# Altium PCB CH32H417QEU6-R0.PcbDoc (part 2 of 2)
Units mil, origin at the board's own origin, x right, y up, seen from the top; angles counter-clockwise.
Board outline 3149.61 x 3818.9 mil, 4 copper layers (Top Layer, Layer 1, Layer 2, Bottom Layer), stack 23.756 mil thick; 96 components, 143 nets, 504 pads, 599 vias.
Unrouted connection lines stored in the file: 18.
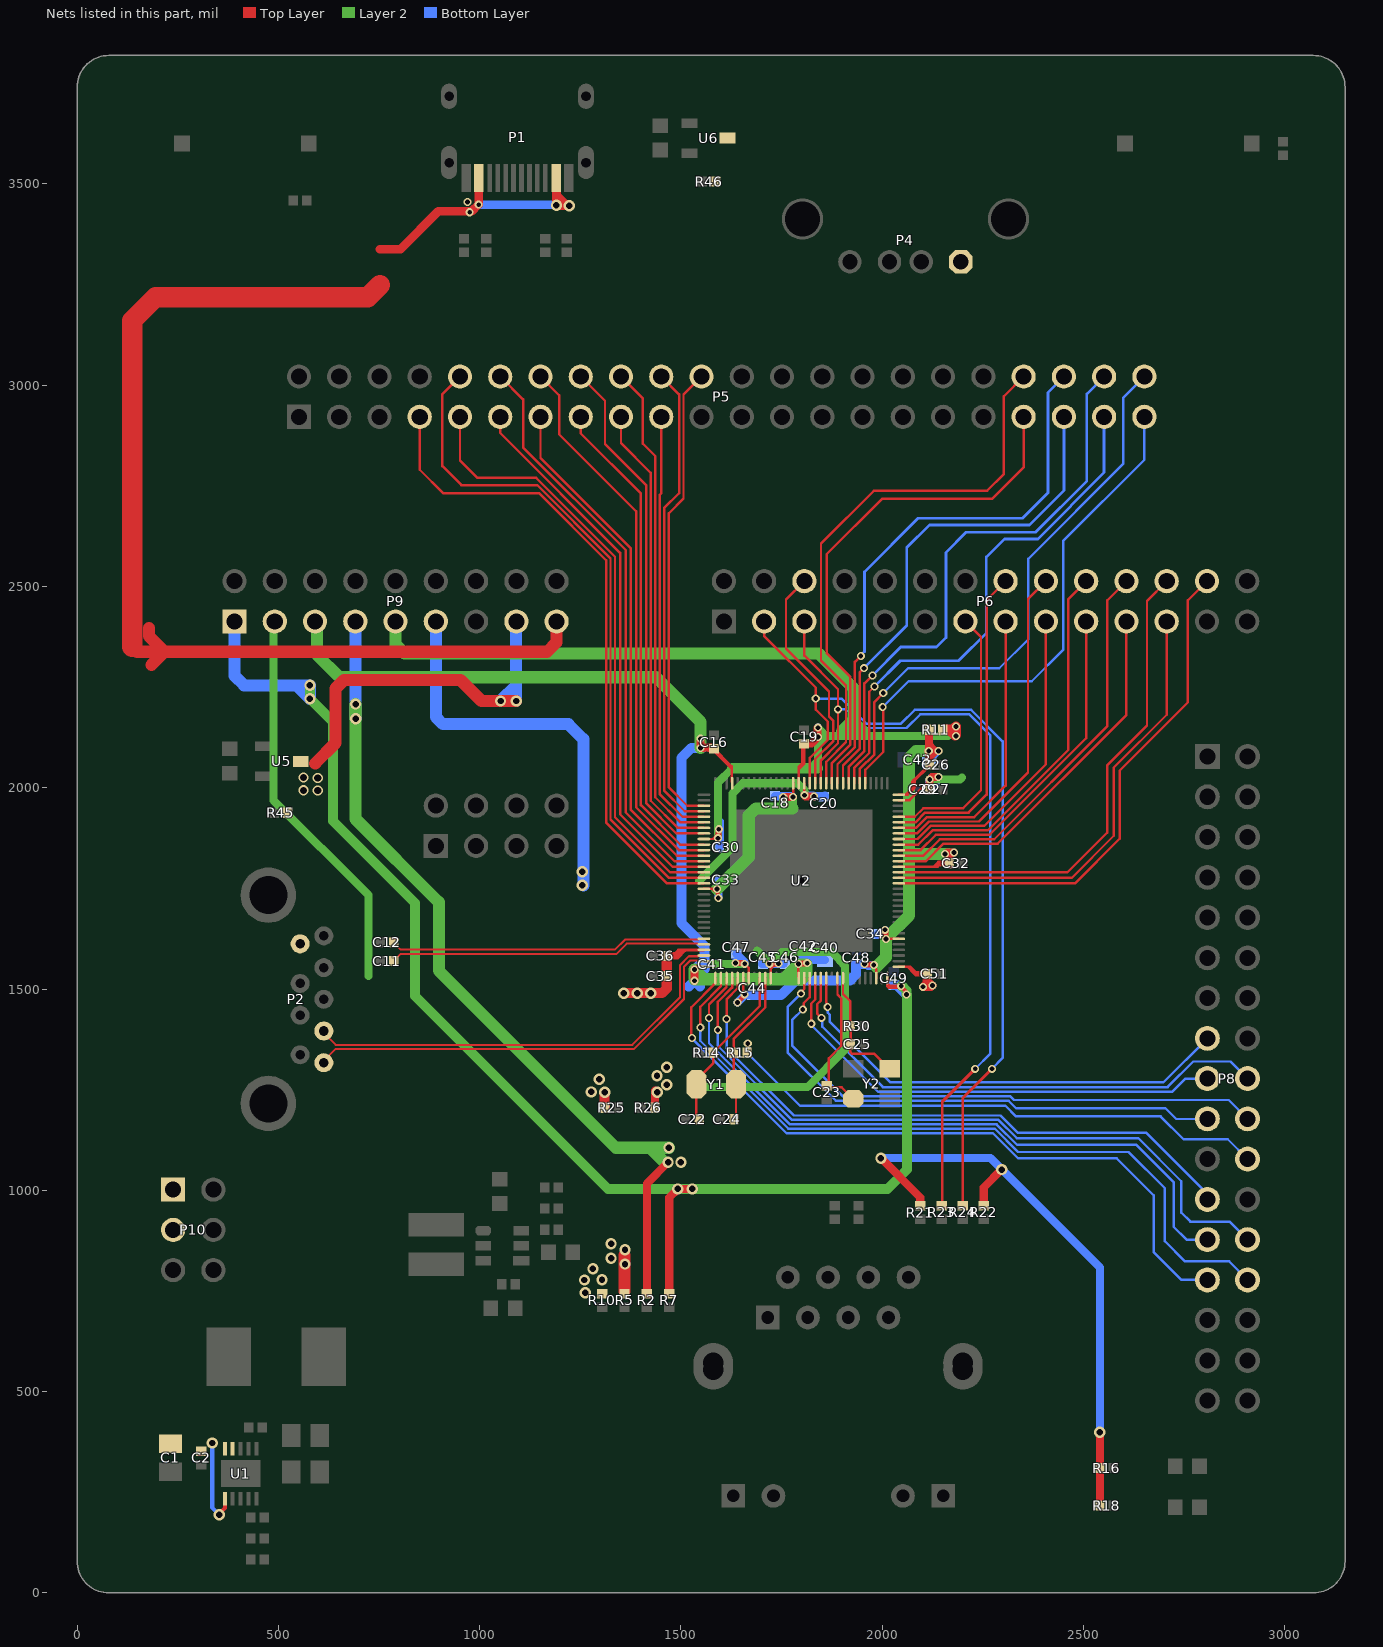
[diagram p4: the nets of this part, all layers, seen from the top]

## Via types
v1: diameter 20, hole 12, Top Layer to Bottom Layer, tented both sides, 461 vias
v2: diameter 17.72, hole 11.81, Top Layer to Bottom Layer, tented both sides, 62 vias
v3: diameter 28, hole 16, Top Layer to Bottom Layer, tented both sides, 48 vias
v4: diameter 25.59, hole 17.72, Top Layer to Bottom Layer, tented both sides, 14 vias
v5: diameter 19.68, hole 11.81, Top Layer to Bottom Layer, tented both sides, 14 vias

## Nets (pads, with @x,y where several pads share a name; then routed paths per layer and width w, separated by ;. In a path a pad name is that pad's centre, name@x,y a point inside that pad or via, vN(x,y) a via of type N, cw(c..) or ccw(c..) an arc to the next point about the centre after c; other vN are vias at no path point) (continued)
PC15: P8.22 R15.1 | length 1399.4
  Top Layer w6: R15.1@1664.2,1341.9 1665.76,1343.46 v1(1665.76,1364.88)
  Bottom Layer w6: v1(1665.76,1364.88) 1665.31,1364.42 1665.31,1340.43 1795.56,1210.19 2305.66,1210.19 2332.33,1183.53 2691.37,1183.53 2748.19,1126.7 2858.23,1126.7 P8.22@2907.49,1077.44
PD0: P5.22 U2.99 | length 1160
  Top Layer w6: P5.22@1551,3021.33 1506.19,2976.52 1506.19,2718.14 1469.96,2681.91 1469.96,2000.74 1515.4,1955.3 U2.99@1557.01,1955.3
PD1: P5.20 U2.100 | length 1182.4
  Top Layer w6: P5.20@1451,3021.33 1495.19,2977.15 1495.19,2731.6 1458.02,2694.44 1458.02,1992.88 1509.38,1941.52 U2.100@1557.01,1941.52
PD2: P5.19 U2.101 | length 1071.8
  Top Layer w6: P5.19@1451,2921.33 1451,2730.9 1447.02,2726.93 1447.02,1984.72 1504,1927.74 U2.101@1557.01,1927.74
PD3: P5.18 U2.102 | length 1227
  Top Layer w6: P5.18@1351,3021.33 1405.5,2966.84 1405.5,2854.26 1436.02,2823.73 1436.02,1976.4 1498.46,1913.96 U2.102@1557.01,1913.96
PD4: P5.17 U2.103 | length 1144.3
  Top Layer w6: P5.17@1351,2921.33 1351,2856.03 1425.02,2782 1425.02,1967.6 1492.44,1900.18 U2.103@1557.01,1900.18
PD5: P5.16 U2.104 | length 1301.9
  Top Layer w6: P5.16@1251,3021.33 1311.18,2961.15 1311.18,2853.7 1414.02,2750.85 1414.02,1960.7 1488.32,1886.4 U2.104@1557.01,1886.4
PD6: P5.15 U2.106 | length 1223.6
  Top Layer w6: P5.15@1251,2921.33 1251,2879.85 1400.34,2730.51 1400.34,1956.78 1498.28,1858.84 U2.106@1557.01,1858.84
PD7: P5.14 U2.107 | length 1380.8
  Top Layer w6: P5.14@1151,3021.33 1197.73,2974.6 1197.73,2877.61 1388.94,2686.4 1388.94,1951.06 1494.94,1845.07 U2.107@1557.01,1845.07
PD8: P5.43 U2.69 | length 1377.8
  Top Layer w6: U2.69@1957.6,2011.4 1957.6,2044.37 2002.69,2089.46 2002.69,2198.81 v1(2001.07,2200.43)
  Bottom Layer w6: v1(2001.07,2200.43) 2065.16,2264.52 2371.2,2264.52 2449.11,2342.43 2449.11,2612.86 2651,2814.75 P5.43@2651,2921.33
PD9: P5.44 U2.70 | length 1435.5
  Top Layer w6: U2.70@1943.82,2011.4 1943.82,2046.15 1980.42,2082.75 1980.42,2212.87 v1(2002.45,2234.9)
  Bottom Layer w6: v1(2002.45,2234.9) 2064.21,2296.66 2290.61,2296.66 2362.76,2368.81 2362.76,2568.81 2598.89,2804.94 2598.89,2969.22 P5.44@2651,3021.33
PD10: P5.41 U2.71 | length 1300.7
  Top Layer w6: U2.71@1930.04,2011.4 1930.04,2048.63 1967.62,2086.21 1967.62,2238.4 v1(1980.94,2251.72)
  Bottom Layer w7: v1(1980.94,2251.72) 2044.51,2315.29 2189.32,2315.29 2258.43,2384.4 2258.43,2573.33 2303.29,2618.18 2386.52,2618.18 2551,2782.66 P5.41@2551,2921.33
PD11: P5.42 U2.72 | length 1425.9
  Top Layer w6: U2.72@1916.26,2011.4 1916.26,2051.82 1955.62,2091.18 1955.62,2259.21 v1(1975.43,2279.02)
  Bottom Layer w7: v1(1975.43,2279.02) 2045.96,2349.55 2134.83,2349.55 2157.97,2372.7 2157.97,2584.41 2208.07,2634.51 2380.56,2634.51 2508.07,2762.01 2508.07,2978.4 P5.42@2551,3021.33
PD12: P5.39 U2.73 | length 1282.8
  Top Layer w6: U2.73@1902.48,2011.4 1902.48,2055.01 1943.62,2096.15 1943.62,2286.09 v1(1954.47,2296.94)
  Bottom Layer w7: v1(1954.47,2296.94) 2060.61,2403.09 2060.61,2596.42 2116.92,2652.72 2365.6,2652.72 2451,2738.12 P5.39@2451,2921.33
PD13: P5.40 U2.74 | length 1394.4
  Top Layer w6: U2.74@1888.7,2011.4 1888.7,2058.2 1931.93,2101.43 1931.93,2312.61 v1(1946.64,2327.33)
  Bottom Layer w7: v1(1946.64,2327.33) 1946.64,2328.37 1956.21,2337.93 1956.21,2536.25 2089.15,2669.19 2347.86,2669.19 2411.5,2732.83 2411.5,2981.83 P5.40@2451,3021.33
PD14: P5.37 U2.75 | length 1316.1
  Top Layer w6: U2.75@1874.92,2011.4 1874.92,2061.4 1920.93,2107.4 1920.93,2275.38 1861.88,2334.43 1861.88,2579.95 1999.26,2717.34 2272.51,2717.34 2351,2795.83 P5.37@2351,2921.33
PD15: P5.38 U2.76 | length 1429.2
  Top Layer w6: U2.76@1861.14,2011.4 1861.14,2064.59 1909.93,2113.37 1909.93,2253.5 1847.69,2315.74 1847.69,2606.51 1979.02,2737.83 2260.4,2737.83 2302.22,2779.66 2302.22,2972.55 P5.38@2351,3021.33
PE0: P5.9 U2.111 | length 1517.4
  Top Layer w6: P5.9@951,2921.33 951,2812.8 994.13,2769.67 1140.31,2769.67 1336.11,2573.88 1336.11,1926.64 1472.8,1789.95 U2.111@1557.01,1789.95
PE1: P5.10 U2.112 | length 1693.6
  Top Layer w6: P5.10@951,3021.33 907.34,2977.67 907.34,2798.89 954.6,2751.62 1142.81,2751.62 1324.94,2569.49 1324.94,1921.22 1469.99,1776.17 U2.112@1557.01,1776.17
PE2: P8.27 U2.1 | length 1786.8
  Top Layer w6: v1(1527.04,1378.33) 1525.73,1379.64 1525.73,1454.73 1585.55,1514.55 U2.1@1585.55,1527.15
  Bottom Layer w6: v1(1527.04,1378.33) 1527.04,1376.82 1762.06,1141.8 2275.01,1141.8 2337.19,1079.63 2582.01,1079.63 2673.87,987.77 2673.87,847 2743.42,777.44 P8.27@2807.49,777.44
PE3: P8.28 U2.2 | length 1859.7
  Top Layer w6: v1(1547.95,1404.66) 1547.95,1455.73 1599.33,1507.11 U2.2@1599.33,1527.15
  Bottom Layer w6: v1(1547.95,1404.66) 1547.95,1371.47 1766.62,1152.8 2279.57,1152.8 2337.17,1095.2 2611.74,1095.2 2701.82,1005.12 2701.82,873.38 2751.95,823.25 2861.68,823.25 P8.28@2907.49,777.44
PE4: P8.25 U2.3 | length 1684.9
  Top Layer w6: v1(1569.53,1428.13) 1569.53,1461.76 1613.11,1505.33 U2.3@1613.11,1527.15
  Bottom Layer w6: v1(1569.53,1428.13) 1569.53,1365.44 1771.17,1163.8 2284.12,1163.8 2335.26,1112.66 2631.4,1112.66 2723.51,1020.55 2723.51,909.53 2755.6,877.44 P8.25@2807.49,877.44
PE5: P8.26 U2.4 | length 1744
  Top Layer w6: v1(1591.39,1398.45) 1591.39,1468.06 1626.89,1503.56 U2.4@1626.89,1527.15
  Bottom Layer w6: v1(1591.39,1398.45) 1591.39,1359.14 1775.73,1174.8 2288.68,1174.8 2334.29,1129.2 2636.18,1129.2 2742.79,1022.58 2742.79,944.72 2765.45,922.07 2862.87,922.07 P8.26@2907.49,877.44
PE6: P8.23 U2.5 | length 1543.1
  Top Layer w6: v1(1613.25,1425.44) 1613.25,1474.36 1640.67,1501.78 U2.5@1640.67,1527.15
  Bottom Layer w6: v1(1613.25,1425.44) 1613.25,1352.84 1780.28,1185.8 2293.24,1185.8 2335.84,1143.2 2654.94,1143.2 2807.49,990.65 P8.23@2807.49,977.44
PE7: P6.21 U2.52 | length 947.8
  Top Layer w6: U2.52@2041.26,1817.51 2108.31,1817.51 2151.95,1861.14 2286.67,1861.14 2606.49,2180.97 P6.21@2606.49,2413
PE8: P6.22 U2.53 | length 1030.6
  Top Layer w6: U2.53@2041.26,1831.29 2102.33,1831.29 2143.19,1872.14 2278.04,1872.14 2559.16,2153.27 2559.16,2465.68 P6.22@2606.49,2513
PE9: P6.19 U2.54 | length 870.3
  Top Layer w6: U2.54@2041.26,1845.07 2095.19,1845.07 2133.27,1883.14 2266.52,1883.14 2506.49,2123.11 P6.19@2506.49,2413
PE10: P6.20 U2.55 | length 955.5
  Top Layer w6: U2.55@2041.26,1858.84 2089.44,1858.84 2124.74,1894.14 2261.97,1894.14 2462.3,2094.48 2462.3,2468.81 P6.20@2506.49,2513
PE11: P6.17 U2.56 | length 796.8
  Top Layer w6: U2.56@2041.26,1872.62 2087.66,1872.62 2120.18,1905.14 2253.23,1905.14 2406.49,2058.41 P6.17@2406.49,2413
PE12: P6.18 U2.57 | length 876.9
  Top Layer w6: U2.57@2041.26,1886.4 2085.89,1886.4 2115.63,1916.14 2239.99,1916.14 2361.89,2038.04 2361.89,2468.41 P6.18@2406.49,2513
PE13: P6.15 U2.58 | length 716.5
  Top Layer w6: U2.58@2041.26,1900.18 2084.11,1900.18 2111.07,1927.14 2228.34,1927.14 2306.49,2005.29 P6.15@2306.49,2413
PE14: P6.16 U2.59 | length 796.3
  Top Layer w6: U2.59@2041.26,1913.96 2082.33,1913.96 2106.52,1938.14 2214.58,1938.14 2259.19,1982.76 2259.19,2465.71 P6.16@2306.49,2513
PE15: P6.13 U2.60 | length 666.5
  Top Layer w6: U2.60@2041.26,1927.74 2080.56,1927.74 2101.96,1949.14 2200.63,1949.14 2245.15,1993.67 2245.15,2374.34 P6.13@2206.49,2413
PF0: P6.5 R23.1 U2.77 | length 2104.5
  Top Layer w6: P6.5@1806.49,2413 1806.49,2328.17 1889.93,2244.73 v1(1889.93,2194.79) 1889.93,2110.34 1847.36,2067.78 U2.77@1847.36,2011.4
  Top Layer w7: R23.1@2148.87,962 2148.87,1219.86 v1(2230.79,1301.78)
  Bottom Layer w6: v1(1889.93,2194.79) 1909.25,2194.79 1955.75,2148.28 2060.48,2148.28 2094.4,2182.21 2216.41,2182.21 2267.93,2130.69 2267.93,1338.92 v1(2230.79,1301.78)
PF1: P6.6 U2.78 | length 587.9
  Top Layer w6: P6.6@1806.49,2513 1760.85,2467.36 1760.85,2345.85 1867.62,2239.08 1867.62,2219.9 1867.62,2176.63 1878.53,2165.71 1878.53,2115.92 1833.58,2070.97 U2.78@1833.58,2011.4
PF2: P6.3 R24.1 U2.79 | length 2216.1
  Top Layer w6: P6.3@1706.49,2413 1706.49,2377.06 1834.79,2248.76 v1(1834.79,2221.31) 1834.79,2193.85 1864.6,2164.05 1864.6,2118.96 1819.8,2074.16 U2.79@1819.8,2011.4
  Top Layer w7: R24.1@2200,962 2200,1229.58 v1(2272.2,1301.78)
  Bottom Layer w6: v1(1834.79,2221.31) 1898.28,2221.31 1960.3,2159.28 2046.58,2159.28 2080.51,2193.21 2220.97,2193.21 2298.96,2115.23 2298.96,1328.54 v1(2272.2,1301.78)
PF3: P5.13 U2.108 | length 1297.8
  Top Layer w6: P5.13@1151,2921.33 1151,2819.11 1375.65,2594.46 1375.65,1945.04 1489.4,1831.29 U2.108@1557.01,1831.29
PF4: P5.12 U2.109 | length 1456.2
  Top Layer w6: P5.12@1051,3021.33 1107.88,2964.45 1107.88,2845.12 1362.79,2590.21 1362.79,1938.73 1484.01,1817.51 U2.109@1557.01,1817.51
PF5: P5.11 U2.110 | length 1372.8
  Top Layer w6: P5.11@1051,2921.33 1051,2881.08 1348.8,2583.27 1348.8,1934.02 1479.1,1803.73 U2.110@1557.01,1803.73
PF6: P8.19 U2.17 | length 1313
  Top Layer w6: v1(1798.24,1488.43) 1798.24,1492.21 1806.02,1500 U2.17@1806.02,1527.15
  Bottom Layer w6: v1(1798.24,1488.43) 1764.99,1455.18 1764.99,1342.15 1884.72,1222.42 2313.67,1222.42 2332.45,1203.64 2703.54,1203.64 2730.13,1177.05 2807.1,1177.05 P8.19@2807.49,1177.44
PF7: P8.20 U2.18 | length 1392.5
  Top Layer w6: v1(1802.59,1449.48) 1804.43,1451.32 1804.43,1464.63 1819.8,1480 U2.18@1819.8,1527.15
  Bottom Layer w6: v1(1802.59,1449.48) 1775.99,1422.88 1775.99,1359.88 1902.45,1233.42 2318.23,1233.42 2327.36,1224.29 2860.64,1224.29 P8.20@2907.49,1177.44
PF8: P8.17 U2.19 | length 1187
  Top Layer w6: v1(1823.64,1413.68) 1823.64,1440.63 1823.64,1463.99 1833.58,1473.94 U2.19@1833.58,1527.15
  Bottom Layer w6: v1(1823.64,1413.68) 1823.64,1410.75 1989.96,1244.42 2719.99,1244.42 2753.01,1277.44 P8.17@2807.49,1277.44
PF9: P8.18 U2.20 | length 1292.4
  Top Layer w6: U2.20@1847.36,1527.15 1847.36,1471.43 1837.97,1462.03 1837.97,1439.5 v1(1849.04,1428.43)
  Bottom Layer w6: v1(1849.04,1428.43) 1851.37,1426.1 1851.37,1406.43 2001.6,1256.21 2708.85,1256.21 2772.49,1319.84 2865.09,1319.84 P8.18@2907.49,1277.44
PF10: P8.15 U2.21 | length 1157.5
  Top Layer w6: U2.21@1861.14,1527.15 1861.14,1465.67 1861.7,1465.11 1861.7,1457.83 v1(1864.38,1455.16)
  Bottom Layer w6: v1(1864.38,1455.16) 1864.8,1454.74 1864.8,1440.96 1869.04,1436.72 1869.04,1419.51 2020.6,1267.94 2697.99,1267.94 P8.15@2807.49,1377.44
PF11: P6.26 U2.48 | length 1323.9
  Top Layer w6: U2.48@2041.26,1762.39 2478.76,1762.39 2589.83,1873.46 2589.83,2042.53 2758.89,2211.59 2758.89,2465.41 P6.26@2806.49,2513
PF12: P6.23 U2.49 | length 1163.9
  Top Layer w6: U2.49@2041.26,1776.17 2470.65,1776.17 2575.03,1880.55 2575.03,2049.81 2706.49,2181.26 P6.23@2706.49,2413
PF13: P6.24 U2.50 | length 1243.9
  Top Layer w6: U2.50@2041.26,1789.95 2460.05,1789.95 2558.3,1888.2 2558.3,2055.32 2657.55,2154.57 2657.55,2464.07 P6.24@2706.49,2513
PF14: P5.7 U2.113 | length 1644.4
  Top Layer w6: P5.7@851,2921.33 851,2789.82 908.93,2731.89 1146.98,2731.89 1313.88,2564.99 1313.88,1913.98 1465.48,1762.39 1480.67,1762.39 ; 1480.67,1762.39 U2.113@1557.01,1762.39
USBSS_RXN: P2.6 U2.126 | length 1100.2
  Top Layer w5.1: P2.6@612.91,1395.7 612.91,1390.47 642,1361.38 1253.1,1361.38 1287.72,1361.38 1379.4,1361.38 1497.49,1479.48 1497.49,1559.51 1519.4,1581.41 1542.25,1581.41 1544.09,1583.25 U2.126@1557.01,1583.25
USBSS_RXP: P2.5 U2.127 | length 1100.2
  Top Layer w5.1: P2.5@612.91,1316.96 612.91,1322.19 642,1351.28 1257.28,1351.28 1283.54,1351.28 1383.58,1351.28 1507.59,1475.29 1507.59,1555.32 1523.59,1571.31 1542.25,1571.31 1544.09,1569.47 U2.127@1557.01,1569.47
USBSS_TXN: C12.2 U2.123 | length 789.7
  Top Layer w5.1: C12.2@786.46,1615.55 786.46,1614.57 803.43,1597.6 1335.89,1597.6 1361.04,1622.75 1542.25,1622.75 1544.09,1624.59 U2.123@1557.01,1624.59
USBSS_TXP: C11.2 U2.124 | length 789.7
  Top Layer w5.1: C11.2@786.46,1569.55 786.46,1570.54 803.43,1587.5 1340.07,1587.5 1365.22,1612.65 1542.25,1612.65 1544.09,1610.81 U2.124@1557.01,1610.81
VBAT: C47.2 P9.11 U2.7 | length 1209.6
  Top Layer w6: v1(1658.21,1562.55) 1668.23,1552.49 U2.7@1668.23,1527.15
  Top Layer w15: v1(1635.32,1564.65) 1652.84,1564.65 1653.99,1563.51 1657.25,1563.51 v1(1658.21,1562.55)
  Layer 2 w20: 1583.56,1562.55 v1(1658.21,1562.55)
  Bottom Layer w20: v1(1635.32,1564.65) 1637.43,1562.55 v1(1658.21,1562.55) ; C47.2@1637.5,1587.44 1638.49,1587.44 1658.21,1567.72 v1(1658.21,1562.55) ; v1@1637.7,1571.06 1639.52,1569.25 1651.51,1569.25 v1(1658.21,1562.55)
  Bottom Layer w30: P9.11@891,2413 891,2175.55 908.57,2157.98 1220.08,2157.98 1257.51,2120.54 1257.51,1791.41 v3@1257.51,1757.45
  other v3: 1254.94,1757.45 1254.94,1791.41
VBUS_CC: C1.2 C2.2 P1.A4 P1.B4 P9.17 P10.1 P10.3 U1.1 U1.9 U1.10 | length 3621.6
  Top Layer w10: v3(353.36,194.4) 353.36,197.2 366.77,210.61 U1.1@366.77,234.35
  Top Layer w22: 752.17,3337.71 803.19,3337.71 897.38,3431.91 980.32,3431.91 v1@997.03,3448.63 ; v1@997.52,3449.11 P1.B4@997.52,3514.64 ; P1.A4@1190.43,3514.64 1190.43,3471.86 ; v3(1222.6,3445.8) v3@1216.49,3445.8 ; 1190.43,3471.86 1190.43,3446.71 v3(1190.53,3446.62) 1191.34,3445.8 v3@1216.49,3445.8 ; 1190.43,3471.86 v3@1216.49,3445.8
  Top Layer w30: 137.05,2349.18 148.42,2337.81 217.38,2337.81 ; 178.75,2396.29 178.75,2376.44 217.38,2337.81 ; 184.82,2305.25 217.38,2337.81 ; P9.17@1191,2413 1191,2361.2 1167.61,2337.81 217.38,2337.81
  Top Layer w50: 137.05,2349.18 137.05,3160.59 194.68,3218.22 721.99,3218.22 752.17,3248.4
  Bottom Layer w10: v3(335.63,372.32) 335.63,212.13 v3(353.36,194.4)
  Bottom Layer w22: v1(997.52,3448.14) 1189,3448.14 v3(1190.53,3446.62)
  other v1: 975.2,3429.39 969.47,3454.8
VBUS_FS: P4.1 R46.2 U6.3
VBUS_USB: P2.1 P9.15 R45.2 U5.3 | length 987.9
  Top Layer w30: 591.45,2060.6 641.96,2111.12 641.96,2246.63 662.81,2267.48 952.29,2267.48 1004.39,2215.38 v3(1051.86,2215.38) v3(1090.57,2215.38)
  Bottom Layer w30: 1090.57,2265 1090.57,2254.09 ; P9.15@1090.57,2412.57 1090.57,2254.09 ; 1090.57,2254.09 v3(1051.86,2215.38) v3(1090.57,2215.38) 1090.57,2254.09
  Bottom Layer w50: P9.15@1090.57,2412.57 P9.15@1091,2413
  other v4: 597.6,1993.15 562.13,1993.54 597.6,2024.07 562.13,2025.28
VDD33: C16.1 C40.2 C41.2 C42.2 P9.5 R5.1 U2.16 U2.93 U2.128 | length 2988.4
  Top Layer w6: v1@1528.24,1552.97 1530.96,1555.69 U2.128@1544.33,1555.69 ; v1@1532.66,1549.49 1538.12,1549.49 U2.128@1544.33,1555.69 ; v1(1533.48,1548.39) v1@1533.48,1548.69 ; U2.128@1557.01,1555.69 U2.128@1544.33,1555.69 ; 1567.1,2092.32 1580.72,2092.32 1625.89,2047.15 ; C16.1@1578.82,2099.55 1579.81,2099.55 1625.89,2053.47 1625.89,2047.15 ; U2.93@1625.89,2014.4 1625.89,2047.15 ; U2.16@1791.24,1530.15 1791.3,1530.21 1791.3,1561.63 v1(1791.55,1561.88)
  Top Layer w15: v1(1791.55,1561.88) 1792.51,1562.84 1811,1562.84 1812.44,1564.28 v1@1812.44,1564.84
  Top Layer w20: v1(1533.48,1520.53) v1(1533.48,1548.39) ; v1@1548.99,2115.31 1548.99,2106.26 1556.18,2099.06 1556.68,2099.55 C16.1@1578.82,2099.55
  Top Layer w30: R5.1@1359.75,748.34 v3@1359.75,839.71
  Layer 2 w30: P9.5@595.41,2421.66 595.41,2330.53 651.56,2274.38 1437.86,2274.38 1548.59,2163.65 v1(1548.59,2121.81) v1(1548.59,2099.06) ; 1556.01,1524.28 1533.48,1524.28 v1(1533.48,1548.39) 1556.01,1525.87 1556.01,1524.28 ; 1556.01,1524.28 1753.95,1524.28 ; 1753.95,1524.28 1790.12,1560.45 1811.87,1560.45 1811.87,1549.73 ; 1753.95,1524.28 1786.43,1524.28 ; 1786.43,1524.28 1811.87,1549.73 ; 1786.43,1524.28 1799.32,1524.28 1811.87,1536.83 1811.87,1549.73
  Bottom Layer w20: v1(1791.55,1561.88) 1804.22,1574.55 ; v1@1794.33,1560.82 v1@1811.84,1560.82 ; v1(1813.61,1564.09) v1@1808.17,1569.53 ; C42.2@1813.61,1588.1 C42.2@1815.08,1589.57 ; C40.2@1857.68,1572.57 C40.2@1856.7,1572.57 ; 1804.22,1574.55 C42.2@1804.22,1589.57 C42.2@1815.08,1589.57 ; 1804.22,1574.55 1804.22,1573.48 v1@1808.17,1569.53 ; v1@1808.17,1569.53 1811.21,1572.57 C40.2@1856.7,1572.57 ; C42.2@1815.08,1589.57 1839.7,1589.57 C40.2@1856.7,1572.57
  Bottom Layer w25: 1519.26,1506.31 v1(1533.48,1520.53) ; 1547.41,1506.6 v1(1533.48,1520.53) ; C41.2@1551.05,1565.58 v1@1533.86,1548.39 ; v1@1552.18,2099.06 v1(1548.59,2099.06) 1526.3,2099.06 1500.89,2073.65 1500.89,1663.94 1557.94,1606.89 C41.2@1557.94,1558.69 ; 1557.94,1548.39 v1@1533.86,1548.39 ; v1(1533.48,1520.53) v1(1533.48,1548.39) v1@1533.86,1548.39
  other v3: 1360.93,816.86 1326.34,831.07 1360.94,852.07 1326.34,867.04
VDD33A: C51.2 P9.3 R10.1 U2.33 | length 1195.5
  Top Layer w6: U2.33@2041.26,1555.69 2062.08,1555.69 ; C51.2@2102.42,1541.82 2082.98,1541.82 2069.11,1555.69 2062.08,1555.69 ; C51.2@2106.89,1537.35 2080.43,1537.35 ; C51.2@2111.39,1533.75 2084.03,1533.75 2080.43,1537.35 ; 2062.08,1555.69 2080.43,1537.35
  Top Layer w20: 2110.39,1521.83 2111.39,1520.83 ; C51.2@2111.39,1531.6 2111.39,1520.83 ; v1@2123.56,1508.66 2111.39,1520.83 ; v1(2124.56,1508.66) 2121.42,1505.52 v1(2101.43,1505.52) 2111.39,1515.49 2111.39,1520.83
  Layer 2 w20: P9.3@488.2,2405.56 488.2,1968.64 723.57,1733.27 723.57,1532.53
  other v3: 1262.1,745.44 1260.15,777.14 1303.75,777.59 1281.28,805.39
VDD_1.2A: C35.2 C36.2 R25.1 U2.125 | length 482.3
  Top Layer w6: C36.2@1464.65,1582.07 1479.41,1582.07 1482.52,1585.18 ; C36.2@1466.29,1586.22 1467.32,1585.18 1482.52,1585.18 ; C36.2@1469.14,1589.28 1469.54,1588.87 1485.15,1588.87 ; C36.2@1473.88,1576.72 1480.37,1576.72 ; C36.2@1474.94,1576.41 1485.59,1576.41 1485.91,1576.72 ; 1484.34,1588.07 1485.15,1588.87 ; 1493.37,1597.03 1485.21,1588.87 ; 1500.69,1597.03 1480.37,1576.72 ; 1506.22,1597.03 1485.91,1576.72 ; 1506.22,1597.53 1493.81,1597.53 1485.15,1588.87 ; 1510.74,1595.1 1492.36,1576.72 1485.91,1576.72 ; 1480.37,1576.72 1485.91,1576.72 ; 1482.52,1585.18 1486.21,1588.87 1485.21,1588.87 ; 1485.15,1588.87 1485.21,1588.87
  Top Layer w7: 1506.22,1597.03 U2.125@1557.01,1597.03
  Top Layer w20: v3@1398.65,1489.15 v3@1399.15,1489.65 ; v3(1425.11,1489.39) v3@1425.37,1489.65
  Top Layer w25: v3@1310.47,1237.11 1310.47,1205.35 1310.76,1205.06 R25.1@1310.86,1205.06 ; v3@1360.98,1489.31 1361.32,1489.65 1399.15,1489.65 1425.37,1489.65 1453.11,1489.65 1464.65,1501.19 C35.2@1464.65,1532.07 C36.2@1464.65,1582.07
  other v3: 1277.16,1244.33 1310.47,1243.78 1296.92,1275.57 1358.05,1489.39 1391.58,1489.39
VDDIO: C18.1 C26.1 C32.1 C33.2 C34.2 C43.2 C44.2 C48.1 P9.7 R2.1 R11.2 R16.1 R18.1 R21.1 R22.1 U2.6 U2.30 U2.38 U2.51 U2.64 U2.82 U2.114 | length 6447.9
  Top Layer w6: v1(1589.25,1748.53) 1589.21,1748.57 1578.05,1748.57 ; v1@1589.7,1726.05 1590.05,1726.4 1590.05,1736.57 1578.05,1748.57 ; v1@1590.83,1742.36 1591.64,1742.36 1592.73,1741.27 v1(1592.73,1725.79) ; U2.6@1654.45,1527.15 1654.45,1494.54 v1@1657.5,1491.5 ; v1@1778.43,1981.98 U2.82@1778.43,2011.37 ; v1(1978.94,1559.45) 1978.94,1555.66 1985.16,1549.44 U2.30@1985.16,1527.15 ; v1(2008.83,1624.59) U2.38@2041.26,1624.59 ; U2.51@2041.26,1803.73 2126.95,1803.73 ; U2.64@2041.26,1982.86 2058.38,1982.86 ; 2077.14,2018.28 C26.1@2114.19,2055.33 ; 2079.2,2020.33 2077.14,2018.27 ; C26.1@2114.94,2051.4 2080.7,2017.15 2080.7,2000.7 2077.14,1997.14 ; C26.1@2116.2,2054.49 C26.1@2116.2,2055.47 ; C32.1@2159.61,1807.55 2159.25,1807.91 2142.01,1807.91 2137.82,1803.73 2131.27,1803.73 ; C32.1@2161.97,1816.26 2139.48,1816.26 2126.95,1803.73 ; C32.1@2166.18,1812.36 2139.9,1812.36 2131.27,1803.73 ; 1578.05,1748.57 1578.01,1748.61 U2.114@1557.01,1748.61 U2.114@1557.01,1748.61 1578.05,1748.57 ; 2058.38,1982.86 2073.78,1998.25 2073.78,2014.91 2077.14,2018.27 ; 2058.38,1982.86 2062.86,1982.86 2077.14,1997.14 ; 2077.14,1997.14 2077.14,2018.27 ; 2126.95,1803.73 2131.27,1803.73
  Top Layer w12: v1(1640.67,1466.8) 1658.3,1484.42 v1(1658.3,1486.91)
  Top Layer w15: v1@1962.44,1560.41 1977.98,1560.41 v1(1978.94,1559.45) ; v1(2007.01,1647.12) 2007.92,1646.21 2007.92,1626.9 2009.05,1625.77 v1@2010.66,1625.77
  Top Layer w20: R2.1@1415.47,741.95 1415.47,1017.15 v3(1467.92,1069.59) ; v1(1754.01,1976.77) v1(1778.4,1976.77) ; v3(1996.55,1079.94) 2094.28,982.2 R21.1@2094.28,961.44 ; v1@2115.27,2091.93 v1@2116.2,2091 ; 2115.8,2075.44 2115.8,2090.61 v1(2115.41,2091) v1@2116.2,2091 ; C26.1@2116.2,2055.47 C26.1@2116.2,2056.47 2116.2,2075.44 ; R11.2@2116.2,2144.25 R11.2@2116.2,2144.16 ; R11.2@2116.87,2144.83 R11.2@2116.2,2144.16 ; 2126.44,2095.45 2116.2,2105.69 ; 2129.35,2088.59 2116.2,2075.44 ; v1@2139.24,2091 v1@2116.2,2091 ; v1@2157.8,1835.68 2161.56,1839.44 v1(2178.03,1839.44) ; v1@2165.69,1835 2165.93,1834.75 2165.93,1812.6 C32.1@2166.18,1812.36 2166.18,1830.63 v1@2174.31,1838.76 ; R22.1@2252,962 2252,1007.06 v3(2296.5,1051.56) ; R18.1@2540.39,217.03 R16.1@2540.39,310.01 v3(2540.39,399.08) ; 2116.2,2075.44 v1@2116.2,2091 ; v1@2116.2,2091 2116.2,2105.69 ; 2116.2,2105.69 R11.2@2116.2,2144.16
  Layer 2 w20: 1751.62,1948.37 1754.01,1950.76 ; 1776.3,1948.37 1778.4,1950.47 v1(1778.4,1976.77) 1766.2,1976.77 ; 1754.01,1950.76 v1(1754.01,1976.77) 1766.2,1976.77 ; 1754.01,1950.76 1766.2,1962.96 1766.2,1976.77
  Layer 2 w30: v3@691.63,2207.92 v3(691.63,2207.76) 691.63,1922.36 898.53,1715.45 898.53,1545.49 1338.24,1105.78 1422.76,1105.78 ; 1454.36,1074.18 1422.76,1105.78 ; v3(1469.96,1105.78) 1422.76,1105.78 ; v1(1589.25,1748.53) 1668.26,1827.54 1668.26,1930.8 1685.84,1948.37 1751.62,1948.37 1776.3,1948.37 ; v1@1985.16,1554.45 2008.83,1578.12 v1(2008.83,1624.59) 2066.52,1682.28 2066.52,1837.93 ; 2066.52,1943.54 2066.52,1837.93 ; 2066.52,1948.37 2066.52,2073.43 2084.09,2091 v1(2115.41,2091) ; v1@2165.69,1835 2069.46,1835 2066.52,1837.93
  Bottom Layer w20: v1@1592.71,1728.24 1593.22,1728.75 C33.2@1593.22,1770.88 ; v1(1640.67,1466.8) 1658.88,1485.01 C44.2@1677.11,1485.01 ; C18.1@1733.73,1979.78 v1@1751,1979.78 ; v1(1754.01,1976.77) v1@1751,1979.78 ; v1(1778.4,1976.77) 1775.39,1979.78 v1@1751,1979.78 ; C48.1@1936.52,1562.47 1936.52,1560.8 1937.8,1559.52 1939.47,1559.52 1939.54,1559.45 v1(1978.94,1559.45) 1976.95,1557.47 v1@1964.15,1557.47 ; C34.2@1986.77,1634.82 C34.2@1987.29,1635.33 ; C34.2@1986.77,1636.83 1986.77,1635.85 C34.2@1987.29,1635.33 ; v3@1997.25,1079.94 2268.44,1079.94 2540.39,807.99 v3(2540.39,399.08) ; v1@2006.08,1642.7 2000.01,1636.63 1988.59,1636.63 C34.2@1987.29,1635.33 ; v1(2007.01,1647.12) 2008.83,1645.3 v1(2008.83,1624.59) 1999.39,1634.04 1988.59,1634.04 C34.2@1987.29,1635.33 ; C43.2@2116.72,2068.92 C43.2@2116.72,2069.92 ; C43.2@2116.72,2069.92 2116.72,2089.69 v1(2115.41,2091) 2139.54,2091 v1(2139.66,2090.89) 2137.7,2090.89 C43.2@2116.72,2069.92
  Bottom Layer w25: C44.2@1677.11,1485.01 1748.86,1485.01 1784.69,1520.84 1919.19,1520.84 1935,1536.65 C48.1@1935,1561.33
  Bottom Layer w30: P9.7@691,2413 691.31,2412.69 691.31,2208.08 v3(691.63,2207.76) v3@691.63,2171.43
  other v1: 1955.56,1562.37 2156.07,1835.18
  other v3: 1499.84,1069.59 692,2171.06
VDDK: C20.1 C45.2 C46.1 R26.1 U2.11 U2.80 | length 1617.6
  Top Layer w6: v1@1722.32,1562.63 1723.29,1561.67 1723.29,1550.86 ; U2.11@1723.35,1527.15 U2.11@1723.35,1527.15 1723.29,1550.86 ; 1729.31,1556.87 1723.29,1550.86 ; U2.80@1806.02,2011.4 1806.08,2011.35 1806.08,1981.96 v1(1806.56,1981.48)
  Top Layer w15: v1@1718.32,1562.63 1718.42,1562.73 1742,1562.73 v1(1742.1,1562.83)
  Top Layer w20: R26.1@1434.83,1205.06 1435.15,1205.38 1435.15,1247.45 v3@1435.48,1247.78 ; v1(1806.56,1981.48) 1809.47,1978.57 v1(1830.48,1978.57)
  Layer 2 w20: 1531.73,1256.88 1814.72,1256.88 1907.32,1349.48 1907.32,1557.37 1894.67,1570.01 1894.67,1571.53 1874.44,1591.76 1751.46,1591.76 1722.32,1562.63 1688.98,1595.98 ; 1544.63,1768.64 1627.75,1851.76 1627.75,1985.85 1652.99,2011.09 1789.6,2011.09 1806.56,1994.13 v1(1806.56,1981.48)
  Bottom Layer w20: C45.2@1700.67,1562.06 C46.1@1754.31,1562.06 ; v1@1810.37,1980.87 1828.18,1980.87 v1@1829.27,1979.78 ; v1@1824.67,1979.78 v1@1829.27,1979.78 ; v1(1830.48,1978.57) v1@1829.27,1979.78 ; C20.1@1854.67,1977.78 1855.65,1977.78 1857.47,1979.59 C20.1@1857.47,1980.57 ; C20.1@1854.78,1979.78 v1@1829.27,1979.78
  other v1: 1719.32,1562.63
  other v3: 1441.03,1243.78 1464.86,1261.97 1440.43,1284.61 1464.86,1305.72
VIO_1.8: C19.1 C27.1 C29.2 C30.1 P9.9 R11.1 U2.63 U2.81 U2.105 | length 3083.4
  Top Layer w6: U2.105@1557.01,1872.62 1557.07,1872.68 1578.92,1872.68 ; 1590.96,1884.72 1578.92,1872.68 ; v1(1591.67,1874.59) 1589.76,1872.68 1578.92,1872.68 ; U2.81@1792.24,2011.4 1792.24,2045.49 ; C19.1@1801.3,2100.54 1801.3,2061.27 1792.24,2052.22 1792.24,2045.49 ; C19.1@1805.72,2109.68 1805.72,2058.96 1792.24,2045.49 ; U2.63@2041.26,1969.08 2067.99,1969.08 2095.64,1996.74 ; C27.1@2112.14,2000.87 2111.76,2000.5 2099.41,2000.5 2095.64,1996.74 ; C27.1@2116.2,1996.74 2095.64,1996.74
  Top Layer w15: v1@1591.13,1876.36 1592.09,1876.36 1593.02,1877.3 1593.02,1895.82 v1(1593.98,1896.78)
  Top Layer w20: C19.1@1805.72,2109.68 1824.02,2109.68 v1@1838.71,2124.37 ; v1@1838.71,2148.29 v1@1838.71,2124.37 ; v1(1840.56,2126.23) v1@1838.71,2124.37 ; C27.1@2116.2,1996.74 2116.97,1997.51 2116.97,2019.89 v1(2117.75,2020.67) 2123.21,2026.14 v1@2135.15,2026.14
  Top Layer w25: R11.1@2151.66,2144.25 2168.03,2144.25 ; v1@2179.7,2149.24 2174.71,2144.25 2166.03,2144.25 v1@2180.35,2129.94 ; v1@2182.73,2131.02 v1(2182.73,2152.28)
  Layer 2 w20: v1(1591.67,1874.59) 1591.67,2012.71 1627.36,2048.41 ; 1822.52,2048.54 1840.56,2066.58 ; v1@1840.3,2147.49 1840.56,2147.23 v1(1840.56,2126.23) 1840.56,2066.58 ; 1840.56,2048.41 1840.56,2066.58 ; v1@1840.56,2148.29 1859.88,2128.97 ; v1@1842.99,2128.97 1859.88,2128.97 ; 1843.22,2107.96 1864.23,2128.97 ; v1(2117.75,2020.67) 2193.51,2020.67 2198.12,2025.28 ; 2162.84,2128.97 1864.23,2128.97 ; 1859.88,2128.97 1864.23,2128.97
  Layer 2 w25: 1627.36,2048.41 1840.56,2048.41
  Layer 2 w30: P9.9@791,2413 791,2355.64 813.22,2333.42 1842.08,2333.42 1928.02,2247.48 1928.02,2168.42 ; 1899.75,2140.15 1928.02,2168.42 ; 1928.02,2140.06 1928.02,2164.25 ; 1952.54,2139.72 1928.02,2164.25 ; 1928.02,2164.25 1928.02,2168.42
  Bottom Layer w20: C30.1@1596.31,1853.69 1596.31,1916.12 ; v1@1840.37,2148.85 v1(1840.56,2149.05) ; C29.2@2116.72,1995.96 C29.2@2116.72,1996.95 ; C29.2@2116.72,1996.95 2116.72,2019.64 v1(2117.75,2020.67) 2123.37,2026.29 v1(2139.77,2026.29) 2139.77,2020 C29.2@2116.72,1996.95
  other v1: 2182.73,2128.2
VREF: C49.2 P9.1 R7.1 U2.32 | length 3671.5
  Top Layer w6: 2012.72,1506.37 2016.49,1502.6 2041.7,1502.6 v1(2046.97,1507.87) 2018.82,1507.87 2012.77,1513.92 2012.77,1527.09 U2.32@2012.72,1527.15 2012.72,1506.37
  Top Layer w10: v1(2046.97,1507.87) 2046.97,1506.01 2058.06,1494.92 2058.06,1490.17 v1@2058.43,1489.8
  Top Layer w20: R7.1@1470.9,743.09 1470.9,982.19 v3(1492.17,1003.46) v3(1528.07,1003.46)
  Layer 2 w25: v3(578.2,2254.42) v3(578.2,2221.03) 635.54,2163.69 635.54,1917.45 839.56,1713.42 839.56,1482.61 1318.71,1003.46 v3(1492.17,1003.46) v3(1528.07,1003.46) 2012.83,1003.46 2061.16,1051.8 v1@2061.16,1484.83 ; v1(2046.97,1507.87) 2048.26,1507.87 2059.97,1496.16 v1(2059.97,1486.02)
  Bottom Layer w25: C49.2@2028.52,1509.64 2036.36,1509.64 v1(2059.97,1486.02)
  Bottom Layer w30: P9.1@391,2413 391,2278.11 414.85,2254.27 544.96,2254.27 ; 544.96,2254.27 578.05,2254.27 v3(578.2,2254.42) v3(578.2,2221.03) 544.96,2254.27
X32KI: C22.1 R14.2 U2.9 Y1.1 | length 418.7
  Top Layer w6: C22.1@1544.83,1176.41 1538.3,1182.94 Y1.1@1538.3,1263.26 1538.3,1274.38 1580.51,1316.59 1580.51,1342.88 1695.79,1458.16 U2.9@1695.79,1527.15
X32KO: C24.1 R15.2 U2.10 Y1.2 | length 388.5
  Top Layer w6: C24.1@1630.49,1176.41 1636.73,1182.64 Y1.2@1636.73,1263.26 1630.73,1269.26 R15.2@1630.73,1341.9 1630.73,1351.13 1630.73,1375.82 1709.57,1454.65 U2.10@1709.57,1527.15
XI: C23.2 U2.23 Y2.1 | length 361.4
  Top Layer w6: U2.23@1888.7,1527.15 1888.7,1485.93 1898.14,1476.49 1898.14,1358.91 1866.96,1327.72 1866.96,1255.62 1899.34,1255.62 Y2.1@1928.06,1226.89
XO: C25.2 R30.2 U2.24 Y2.3 | length 307.6
  Top Layer w6: U2.24@1902.48,1527.15 1902.48,1487.71 1920.65,1469.54 R30.2@1920.65,1408.06 1922.12,1406.6 C25.2@1922.12,1360.24 ; C25.2@1920.65,1361.71 C25.2@1920.65,1362.7 1920.65,1343.2 1924.16,1339.68 1979.69,1339.68 2007.92,1311.45 Y2.3@2019.6,1311.45
pads on no net: P1.A8 P1.B8 P7. P7.7 U1.2 U1.3 U3.1

## Polygon pours and split planes (outlines as drawn)
5V on Top Layer "5V" (solid, remove dead copper, pour order 14): 1545.42,3550.32 1565.61,3530.13 1565.61,3486.76 1557.41,3478.56 1497.56,3478.56 1486.22,3489.9 1486.22,3540.13 1481.36,3545.39 1346.31,3545.39 1292.72,3598.98 799.68,3598.98 782.07,3581.37 782.07,3458.1 766.06,3442.1 663.61,3442.1 646,3459.71 646,3647 671.49,3672.49 1331.32,3672.49 1391.94,3611.88 1536.15,3611.88 1545.42,3602.6
GND on Top Layer "GND" (solid, remove dead copper, pour order 19): 0,3740.16 0,3818.9 3149.61,3818.9 3149.61,0 0,0 0,78.74
5V on Top Layer "VBUS_USB" (solid, remove dead copper, pour order 13): 1154.12,791.94 1154.12,497.96 1130.95,474.8 794.91,474.8 740.55,420.43 740.55,276.63 725.26,261.34 581.46,261.34 571.45,271.35 571.45,839.94 544.8,866.59 315.76,866.59 296.28,886.06 296.28,1030.62 314.26,1048.6 625.88,1048.6 718.88,955.59 718.88,635.68 740.55,614.01 1004.49,614.01 1077.83,687.36 1077.83,828.03 1087.44,837.63 1125.58,837.63 1139.03,824.18 1139.03,807.02
VBUS_CC on Top Layer "VBUS_CC" (solid, remove dead copper, pour order 0): 195.2,445.99 224.13,417.06 376.99,417.06 391.22,402.83 391.22,343.31 388.99,341.07 72.41,341.07 63.21,350.27 63.21,3161.79 154.81,3253.39 645.47,3253.39 709.72,3317.63 857.5,3465.41 980.56,3465.41 985.63,3470.48 985.63,3545.54 987.66,3547.57 1005.41,3547.57 1009.47,3543.52 1009.47,3419.77 989.18,3399.48 922.75,3399.48 883.18,3359.92 883.18,3320.07 719.94,3156.82 254.44,3156.82 192.75,3095.13 192.75,1050.11 205.49,1037.36 252.84,1037.36 270.07,1020.14 268.63,963.21 268.63,865.15 257.34,853.86 202.12,853.86 195.2,846.71
VBUS_FS on Top Layer "VBUS_USB" (solid, remove dead copper, pour order 9): 1598,3679.76 1583.9,3665.66 1583.9,3537.22 1577.41,3530.73 1577.41,3488.99 1581.58,3484.82 1649.28,3484.82 1664.58,3500.12 1664.58,3594.25 1671.08,3601.11 1970.02,3601.11 2161.72,3409.41 2161.72,3273.01 2181.38,3263.18 2218.25,3263.18 2244.05,3288.98 2244.05,3510.18 2074.47,3679.76
GND on Layer 2 "GND" (solid, remove dead copper, pour order 18): 87.22,5 0,5 0,3818.9 3148.52,3818.9 3148.52,0 92.06,0 92.06,-1.65
VDDK on Layer 2 "VDDK" (solid, remove dead copper, pour order 6): 1419.65,1318.37 1429.29,1328.02 1458.64,1328.02 1495.7,1292.14 1814.49,1292.14 1881.94,1359.6 1881.94,1540.16 1847.5,1574.6 1768.12,1574.6 1746.44,1552.92 1706.69,1552.92 1681.99,1577.61 1616.08,1577.61 1522.4,1671.28 1522.4,1776.35 1609.12,1863.07 1609.12,2007.61 1629.28,2027.77 1829.28,2027.77 1845.84,2011.21 1845.84,1978.15 1838.45,1970.75 1800.71,1970.75 1795.22,1976.25 1795.22,1982.92 1784.98,1993.16 1673.56,1993.16 1645.86,1965.46 1645.86,1841.39 1565.16,1760.69 1565.16,1681.29 1635.72,1610.73 1906.78,1610.73 1930.12,1587.39 1930.12,1289.54 1858.91,1218.33 1515.53,1218.33 1437.39,1218.33 1419.65,1236.07
VIO_1.8 on Layer 2 "VIO_1.8" (solid, remove dead copper, pour order 5): 1500.31,1958.57 1500.31,2054.11 1516.78,2070.18 1588.78,2070.18 1797.47,2070.18 1810.42,2083.13 1810.42,2142.23 1830.07,2161.88 2361.04,2161.88 2385.91,2137.02 2385.91,2075.22 2386.38,2074.76 2386.38,2015.5 2361.89,1991 2117.51,1991.23 2117.25,1991.23 2102.52,2005.96 2102.52,2029.33 2112.17,2038.99 2249.08,2038.99 2265.56,2055.46 2265.56,2093.9 2242.74,2116.72 1910.97,2116.72 1888.11,2093.86 1888.11,2067.44 1854.07,2033.4 1628.98,2033.4 1604.09,2008.5 1604.09,1868.78 1598.3,1862.99 1521.25,1862.99 1499.36,1884.88 1500.89,1957.99
VDDIO on Layer 2 "VDDIO" (solid, remove dead copper, pour order 3): 1451.39,1056.27 1440.86,1066.8 1440.86,1113.36 1446.17,1119.48 1831.08,1119.48 1862.43,1150.83 1973.54,1261.95 1973.54,1512.36 1934.23,1551.67 1934.23,1590.69 2045.21,1701.67 2045.21,1914.78 2030.62,1929.37 1706.53,1929.37 1687.26,1910.09 1687.26,1807.96 1618.58,1739.29 1618.46,1721.52 1607.36,1710.42 1577.24,1710.42 1571.58,1716.07 1571.58,1760.03 1650.78,1839.23 1650.78,1952.81 1679.96,1981.99 1775.83,1981.99 1793.14,1964.68 1967.21,1964.68 2024.55,2022.01 2024.55,2082.8 2054.25,2112.5 2147.5,2112.5 2158.55,2101.45 2158.55,2061.39 2153.02,2055.86 2116.64,2055.86 2096.49,2035.71 2096.49,1919.05 2126.87,1888.67 2156.03,1888.67 2188.84,1855.86 2188.84,1801.18 2182.77,1795.11 2139.02,1795.11 2108.64,1764.73 2108.64,1627.41 2023.99,1542.76 2026.92,1078.01 2005.19,1056.27
VBAT on Layer 2 "VBAT" (solid, remove dead copper, pour order 7): 1239.37,1803.84 1232.75,1797.21 1232.75,1750.17 1247.71,1735.21 1365.15,1735.21 1371.64,1728.72 1558.36,1542 1662.04,1542 1672.79,1552.75 1672.79,1568.46 1665.08,1578.27 1602.89,1578.27 1501.15,1680 1431,1749.83 1403.78,1777.06 1377.18,1803.84
VDD33A on Layer 2 "VDD33A" (solid, remove dead copper, pour order 2): 1241.76,722.66 1241.76,903.39 1235.07,910.14 1165.29,910.14 713.98,1361.44 713.98,1649.91 452.73,1911.16 452.73,2432.59 465.74,2445.6 508.04,2445.6 520.25,2433.4 520.25,1959.01 782.22,1697.04 782.22,1414.15 1219.59,976.78 1277.58,976.78 2060.85,976.78 2089.68,1005 2089.68,1517.93 2097.2,1525.44 2139.36,1525.44 2185.34,1479.46 2185.34,930.04 2145.95,890.64 1480.43,890.64 1465.29,872.64 1465.29,731.31 1448.71,714.73 1249.69,714.73
3V3 on Layer 2 "3V3" (solid, remove dead copper, pour order 1): 760.5,2545.75 834.15,2619.4 868.25,2653.5 1602.71,2653.5 1648.24,2607.97 1648.24,2394.69 1629.73,2376.19 1569.56,2376.19 1546.14,2399.61 1546.14,2555.24 1526.53,2574.86 969.3,2574.86 926.33,2531.88 926.33,2476.08 915.94,2465.69 226.58,2465.69 178.12,2417.77 178.12,785.69 298.37,665.45 1480.86,665.45 1501.32,644.99 1501.32,605.99 1479.44,584.11 247.7,584.11 90.79,741.02 90.79,2509.12 126.93,2545.75
VBUS_USB on Bottom Layer "VBUS_USB" (solid, remove dead copper, pour order 17): 507.34,1661.05 507.34,1578.17 512.8,1573.58 588.06,1573.58 599.33,1584.85 599.33,1649.77 687.53,1737.97 687.53,2046.22 682.7,2051.05 534.3,2051.05 529.7,2046.45 529.7,1973.24 535.31,1967.63 598.38,1967.63 606.15,1959.85 605.72,1959.42 605.72,1759.43
5V on Bottom Layer "VBUS_USB" (solid, remove dead copper, pour order 12): 191,2065.3 191,3347.8 234.27,3391.07 637.17,3391.07 647.02,3400.91 647.02,3581.13 660.68,3594.8 765.74,3594.8 781.97,3578.57 781.97,3267.67 747.8,3233.51 351.49,3233.51 327.08,3209.09 327.08,2214 351.56,2189.51 351.56,1157.62 429.32,1079.86 429.32,877.02 420.13,866.59 315.76,866.59 303.43,878.92 303.43,1024.39 191,1136.83
GND on Bottom Layer "GND" (solid, remove dead copper, pour order 20): 0,3818.9 0,0 3149.61,0 3149.61,3818.9
VDD33 on Bottom Layer "VDD33" (solid, remove dead copper, pour order 4): 1393.85,800.94 1335.06,800.94 1311.41,824.6 1311.41,879.8 1339.62,908.45 1339.62,1416.56 1356.23,1433.17 1420.37,1433.17 1469.25,1482.05 1469.25,2088.06 1511.91,2130.72 1561.36,2130.72 1572,2120.08 1572,2075.48 1560.99,2064.47 1534.25,2064.47 1522.72,2052.94 1522.72,1673.92 1572,1624.65 1572,1480.07 1474.42,1382.49 1403.4,1311.47 1403.4,1185.36 1417.51,1171.24 1417.51,824.6
VDD_1.2A on Bottom Layer "VDD_1.2A" (solid, remove dead copper, pour order 8): 1251.09,1514.09 1255.03,1518.47 1432.32,1518.47 1442.6,1508.19 1442.6,1473.23 1418.85,1449.48 1341.38,1449.48 1328.02,1436.13 1328.02,1237.54 1318.6,1228.12 1262.5,1228.12 1251.09,1239.53
GND on Layer 1 "GND" (solid, remove dead copper, pour order 15): 0,0 0,3818.9 3149.61,3818.9 3149.61,0

## Keep-outs
Keep-Out Layer:
  the board outline again, w10

## Other copper
Top Layer:
  rectangle net GND: 441.2,234.35 471.38,277.58
  rectangle net GND: 201.11,262.99 528.51,328.7
  region net 5V: 251.32,2055.49 485,2055.49 489.46,2051.02 489.46,1988.35 500.07,1977.74 500.07,1919.4 494.02,1913.35 446.39,1913.35 439.58,1920.15 439.58,1974.59 436.56,1977.61 245.28,1977.61 243.76,1979.13 243.76,2047.93
  region net VBUS_USB: 611.98,2070.63 611.98,1980.67 604.64,1973.33 558.5,1973.33 555.36,1969.71 555.36,1928.48 549.79,1922.91 516.38,1922.91 511.69,1927.6 511.69,2065.68 527.6,2081.59 601.02,2081.59
  region net VDD33: 1344.81,731.23 1375.95,731.23 1381.46,736.74 1381.46,871.5 1370.34,882.62 1318.22,882.62 1311.63,876.03 1311.63,821.47 1342.32,790.78 1342.32,734.42
  region net 3V3: 1169.89,673.13 1181.39,661.63 1214.11,661.63 1220.49,655.25 1220.49,602.05 1227.25,595.29 1324.81,595.29 1328.16,598.64 1328.16,654.79 1341.13,667.75 1341.13,705.11 1323.38,722.86 1238.95,722.86 1230.63,731.18 1230.63,788.33 1193.29,825.67 1193.29,870.75 1189.61,874.43 1087.37,874.43 1085.29,849.97 1139.29,849.97 1150.54,838.72 1150.54,811.27 1169.89,791.93
  pour cut-out: 445.51,223.04 491.51,223.04 499.83,214.72 499.83,158.88 495.77,154.82 452.77,154.82 445.51,162.08
  region net NetC7_2: 405.44,342.95 430.4,342.95 430.99,343.53 430.99,380.33 440.26,389.6 440.26,526.3 413.76,552.8 413.76,635.18 405.57,643.37 343.43,643.37 325.12,625.06 325.12,491.87 402.61,414.38 402.61,343
  pour cut-out: 366.59,457.95 555.84,457.95 555.84,712.84 366.85,712.84
  pour cut-out: 1594.26,1990.13 2008.83,1990.13 2008.83,1564.88 1594.56,1564.88
  region net VDD_1.2A: 1325.12,1189 1325.12,1279.13 1311.02,1293.23 1260.15,1293.23 1249.65,1282.73 1249.65,1195.09 1258.22,1186.52 1323.47,1186.52
  region net VDDK: 1423.27,1214.71 1423.27,1319.92 1430.8,1327.45 1471.57,1327.45 1477.48,1321.54 1477.48,1195.97 1471.34,1189.83 1432.67,1189.83 1423.27,1196.07
  region net 1V2: 829.78,889.96 959.01,889.96 966.1,897.04 966.1,979.66 990.64,1004.2 1129.44,1004.2 1134.16,1008.92 1134.16,1042.12 1151.88,1059.84 1358.14,1059.84 1413.52,1115.22 1413.52,1219.15 1406.6,1226.06 1341.26,1226.06 1333.72,1218.52 1333.72,1176.32 1312.63,1155.23 908.98,1155.23 826.61,1072.86 826.61,893.14
  region net NetL2_1: 1026.01,836.09 968.66,836.09 959.29,845.46 833.53,845.46 824.44,836.37 824.44,793.22 824.16,792.94 832.68,784.42 1003.01,784.42 1028.28,809.69 1028.28,834.1
  region net VDDIO: 1405.19,733.03 1431.71,733.03 1442.96,744.28 1442.96,1014.73 1479.13,1050.9 1509.27,1050.9 1517.71,1059.33 1517.71,1090.68 1485.96,1122.43 1456.63,1122.43 1398.76,1064.56 1398.76,740.26 1399.96,739.05
  region net VDD33A: 1252.95,730.95 1247.26,736.64 1247.26,803.84 1261.04,817.62 1298.53,817.62 1323.34,792.82 1323.34,736.09 1318.19,730.95
  pour cut-out: 826.61,920.22 826.61,787.05 963.63,787.05 963.63,920.07
  region net 3V3: 1279.8,722.86 1485.84,722.86 1498.44,710.26 1498.44,667.75 1403.82,667.75 1278.44,667.75 1272.81,673.38 1272.81,719.35
  pour cut-out: 562.13,1801.23 562.13,1993.54 685.49,2116.9 1218,2116.9 1243.49,2091.41 1243.49,1904.93 1426.83,1721.59 1608.92,1721.59 1625.04,1705.47 1625.04,1486.83 1364.06,1225.85 495.41,1225.85 428.5,1292.76 428.5,1667.61
Layer 1:
  rectangle net GND: 1658.23,1619.09 1949.91,1921.5
Layer 2:
  rectangle net GND: 1700,1700.59 1945.62,1899.15
  rectangle net GND: 1666.81,1632.83 1934.66,1696.3
Bottom Layer:
  region net VBUS_CC: 957.37,3462.8 972.94,3478.37 1229.11,3478.37 1240.1,3467.38 1240.1,3426.26 1232.37,3418.53 963.06,3418.53 957.37,3424.21

## Silkscreen, mask and mechanical layers (free items; w line width, h text height)
Top Overlay:
  lines w8: 140.33,902.56 176.76,902.56 ; 140.33,1010.05 176.76,1010.05
  lines w10: 886.7,2014.02 886.7,2043.19 976.45,2043.19 ; 1099.85,2043.19 1189.6,2043.19 1189.6,2014.02
  text "PA15" at 1734.59,3212.09 h35 r270
  text "PA13" at 1834.64,3212.09 h35 r270
  text "PA10" at 1934.68,3212.09 h35 r270
  text "PD15" at 2334.87,3212.09 h35 r270
  text "PD13" at 2434.92,3212.09 h35 r270
  text "PC11" at 1634.54,3200.43 h35 r270
  text "PD11" at 2534.97,3200.43 h35 r270
  text "KEY" at 534.14,3189.67 h35 r270
  text "PB6" at 634.17,3182.94 h35 r270
  text "PB4" at 734.17,3182.94 h35 r270
  text "PB3" at 834.17,3182.94 h35 r270
  text "PF4" at 1034.26,3182.94 h35 r270
  text "PD7" at 1134.31,3182.94 h35 r270
  text "PD5" at 1234.35,3182.94 h35 r270
  text "PD3" at 1334.4,3182.94 h35 r270
  text "PD0" at 1534.5,3182.94 h35 r270
  text "PA9" at 2034.73,3182.94 h35 r270
  text "PC9" at 2134.78,3182.94 h35 r270
  text "PC7" at 2234.82,3182.94 h35 r270
  text "PD9" at 2635.01,3182.94 h35 r270
  text "PE1" at 934.21,3171.27 h35 r270
  text "PD1" at 1434.45,3171.27 h35 r270
  text "GND" at 534.14,2852.6 h35 r270
  text "PB7" at 640.83,2852.29 h35 r270
  text "PB5" at 740.83,2852.29 h35 r270
  text "PF14" at 840.83,2852.29 h35 r270
  text "PE0" at 940.5,2852.29 h35 r270
  text "PF5" at 1040.18,2852.29 h35 r270
  text "PF3" at 1139.86,2852.29 h35 r270
  text "PD6" at 1239.54,2852.29 h35 r270
  text "PD4" at 1339.21,2852.29 h35 r270
  text "PD2" at 1438.89,2852.29 h35 r270
  text "PC12" at 1538.57,2852.29 h35 r270
  text "PC10" at 1638.24,2852.29 h35 r270
  text "PA14" at 1737.92,2852.29 h35 r270
  text "PA12" at 1837.6,2852.29 h35 r270
  text "PA11" at 1937.27,2852.29 h35 r270
  text "PA8" at 2036.95,2852.29 h35 r270
  text "PC8" at 2136.63,2852.29 h35 r270
  text "PC6" at 2236.31,2852.29 h35 r270
  text "PD14" at 2335.98,2852.29 h35 r270
  text "PD12" at 2435.66,2852.29 h35 r270
  text "PD10" at 2535.34,2852.29 h35 r270
  text "PD8" at 2635.01,2852.46 h35 r270
  text "NRST" at 1888.49,2708.72 h35 r270
  text "PB14" at 1988.85,2702.89 h35 r270
  text "PB12" at 2089.22,2702.89 h35 r270
  text "PB10" at 2189.58,2702.89 h35 r270
  text "PE14" at 2289.94,2702.89 h35 r270
  text "PE12" at 2390.31,2702.89 h35 r270
  text "PE10" at 2490.67,2702.89 h35 r270
  text "PF13" at 2691.4,2702.89 h35 r270
  text "PF11" at 2791.76,2691.23 h35 r270
  text "3V3" at 375.34,2673.57 h35 r270
  text "3V3" at 474.97,2673.57 h35 r270
  text "3V3" at 574.61,2673.57 h35 r270
  text "3V3" at 674.24,2673.57 h35 r270
  text "3V3" at 773.87,2673.57 h35 r270
  text "3V3" at 873.51,2673.57 h35 r270
  text "GND" at 973.14,2673.57 h35 r270
  text "GND" at 1072.78,2673.57 h35 r270
  text "GND" at 1172.41,2673.57 h35 r270
  text "GND" at 1691.08,2673.73 h35 r270
  text "PE8" at 2591.04,2673.73 h35 r270
  text "3V3" at 1589.58,2672.48 h35 r270
  text "PF1" at 1788.13,2662.07 h35 r270
  text "PB1" at 2892.13,2662.07 h35 r270
  text "VIO_1.8" at 770.96,2354.73 h35 r270
  text "VREF" at 375.34,2347.73 h35 r270
  text "VDD33A" at 474.24,2347.73 h35 r270
  text "VDD33" at 573.15,2347.73 h35 r270
  text "VDDIO" at 672.05,2347.73 h35 r270
  text "VBAT" at 875.69,2347.73 h35 r270
  text "GND" at 974.6,2347.73 h35 r270
  text "VBUS_USB" at 1073.5,2347.73 h35 r270
  text "VBUS_CC" at 1178.24,2347.73 h35 r270
  text "PF2" at 1689.26,2343.34 h35 r270
  text "PF0" at 1789.5,2343.34 h35 r270
  text "PB15" at 1889.74,2343.34 h35 r270
  text "PB13" at 1989.98,2343.34 h35 r270
  text "PB11" at 2090.22,2343.34 h35 r270
  text "PE15" at 2190.46,2343.34 h35 r270
  text "PE13" at 2290.69,2343.34 h35 r270
  text "PE11" at 2390.93,2343.34 h35 r270
  text "PE9" at 2491.17,2343.34 h35 r270
  text "PE7" at 2591.41,2343.34 h35 r270
  text "PF12" at 2691.65,2343.34 h35 r270
  text "PB2" at 2791.89,2343.34 h35 r270
  text "PB0" at 2892.13,2343.34 h35 r270
  text "3V3" at 1589.58,2340.76 h35 r270
  text "PC5" at 2976.22,2063.1 h35
  text "GND" at 2639.16,2057.26 h35
  text "GND" at 995.19,2027.52 h35
  text "PA7" at 2639.16,1962.93 h35
  text "PC4" at 2976.22,1962.93 h35
  text "PA5" at 2639.16,1862.76 h35
  text "PA6" at 2976.22,1862.76 h35
  text "3V3" at 874.37,1781.73 h35 r270
  text "GND" at 974.68,1781.73 h35 r270
  text "PB9" at 1074.99,1781.73 h35 r270
  text "PB8" at 1175.3,1781.73 h35 r270
  text "PA3" at 2639.16,1762.59 h35
  text "PA4" at 2976.22,1762.59 h35
  text "PA1" at 2650.82,1662.43 h35
  text "PA2" at 2976.22,1662.43 h35
  text "PC3" at 2639.16,1562.26 h35
  text "PA0" at 2976.22,1562.26 h35
  text "PC1" at 2650.82,1462.09 h35
  text "PC2" at 2976.22,1462.09 h35
  text "PF10" at 2610,1361.92 h35
  text "PC0" at 2976.22,1361.92 h35
  text "PF8" at 2639.16,1261.76 h35
  text "PF9" at 2976.22,1261.76 h35
  text "PF6" at 2639.16,1161.59 h35
  text "PF7" at 2976.22,1161.59 h35
  text "VBUS_CC" at 57.07,1112.63 h35 r270
  text "PC14" at 2610,1061.42 h35
  text "PC15" at 2976.22,1061.42 h35
  text "VBUS_USB" at 408.84,987.92 h35
  text "PE6" at 2639.16,961.25 h35
  text "PC13" at 2976.22,961.25 h35
  text "VBUS_USB" at 408.84,872.42 h35
  text "PE4" at 2639.16,861.09 h35
  text "PE5" at 2976.22,861.09 h35
  text "GND" at 67.39,775.47 h35
  text "GND" at 408.84,775.47 h35
  text "PE2" at 2639.16,760.92 h35
  text "PE3" at 2976.22,760.92 h35
  text "LED1" at 2615.83,660.75 h35
  text "LED2" at 2976.22,660.75 h35
  text "GND" at 2639.16,560.59 h35
  text "GND" at 2976.22,560.59 h35
  text "3V3" at 2643.82,461.74 h35
  text "3V3" at 2975.54,461.74 h35
  text "CH32H417QEU6-R0-1v3" at 2369.36,33.32 h35
Mechanical 1:
  the board outline again, w10

## Text inside footprints (layer, text, board x,y; h text height)
LED1: Top Overlay "+" at 2689.47,304.12 h40 r90
LED2: Top Overlay "+" at 2689.47,202.21 h40 r90
P2: Bottom Overlay "T+" at 512.86,1617.24 h31.5; Bottom Overlay "T-" at 512.86,1541.24 h31.5; Bottom Overlay "G" at 512.86,1459.24 h31.5; Bottom Overlay "R+" at 512.86,1377.24 h31.5; Bottom Overlay "R-" at 512.86,1306.24 h31.5; Bottom Overlay "G" at 423.86,1324.24 h31.5; Bottom Overlay "D+" at 423.86,1424.24 h31.5; Bottom Overlay "D-" at 423.86,1504.24 h31.5; Bottom Overlay "V" at 423.86,1596.24 h31.5
P4: Top Overlay "D-" at 2135.17,3426.33 h40 r180; Top Overlay "D+" at 2045.17,3426.33 h40 r180; Top Overlay "V" at 2215.17,3426.33 h40 r180; Top Overlay "G" at 1935.17,3426.33 h40 r180